# Altium PCB PCB.PcbDoc (part 3 of 3)
Units mm, origin at the board's own origin, x right, y up, seen from the top; angles counter-clockwise.
Board outline 145 x 65 mm, 4 copper layers (Top Layer, GND, VDD, Bottom Layer), stack 1.565 mm thick; 229 components, 167 nets, 739 pads, 265 vias.
Unrouted connection lines stored in the file: 1.
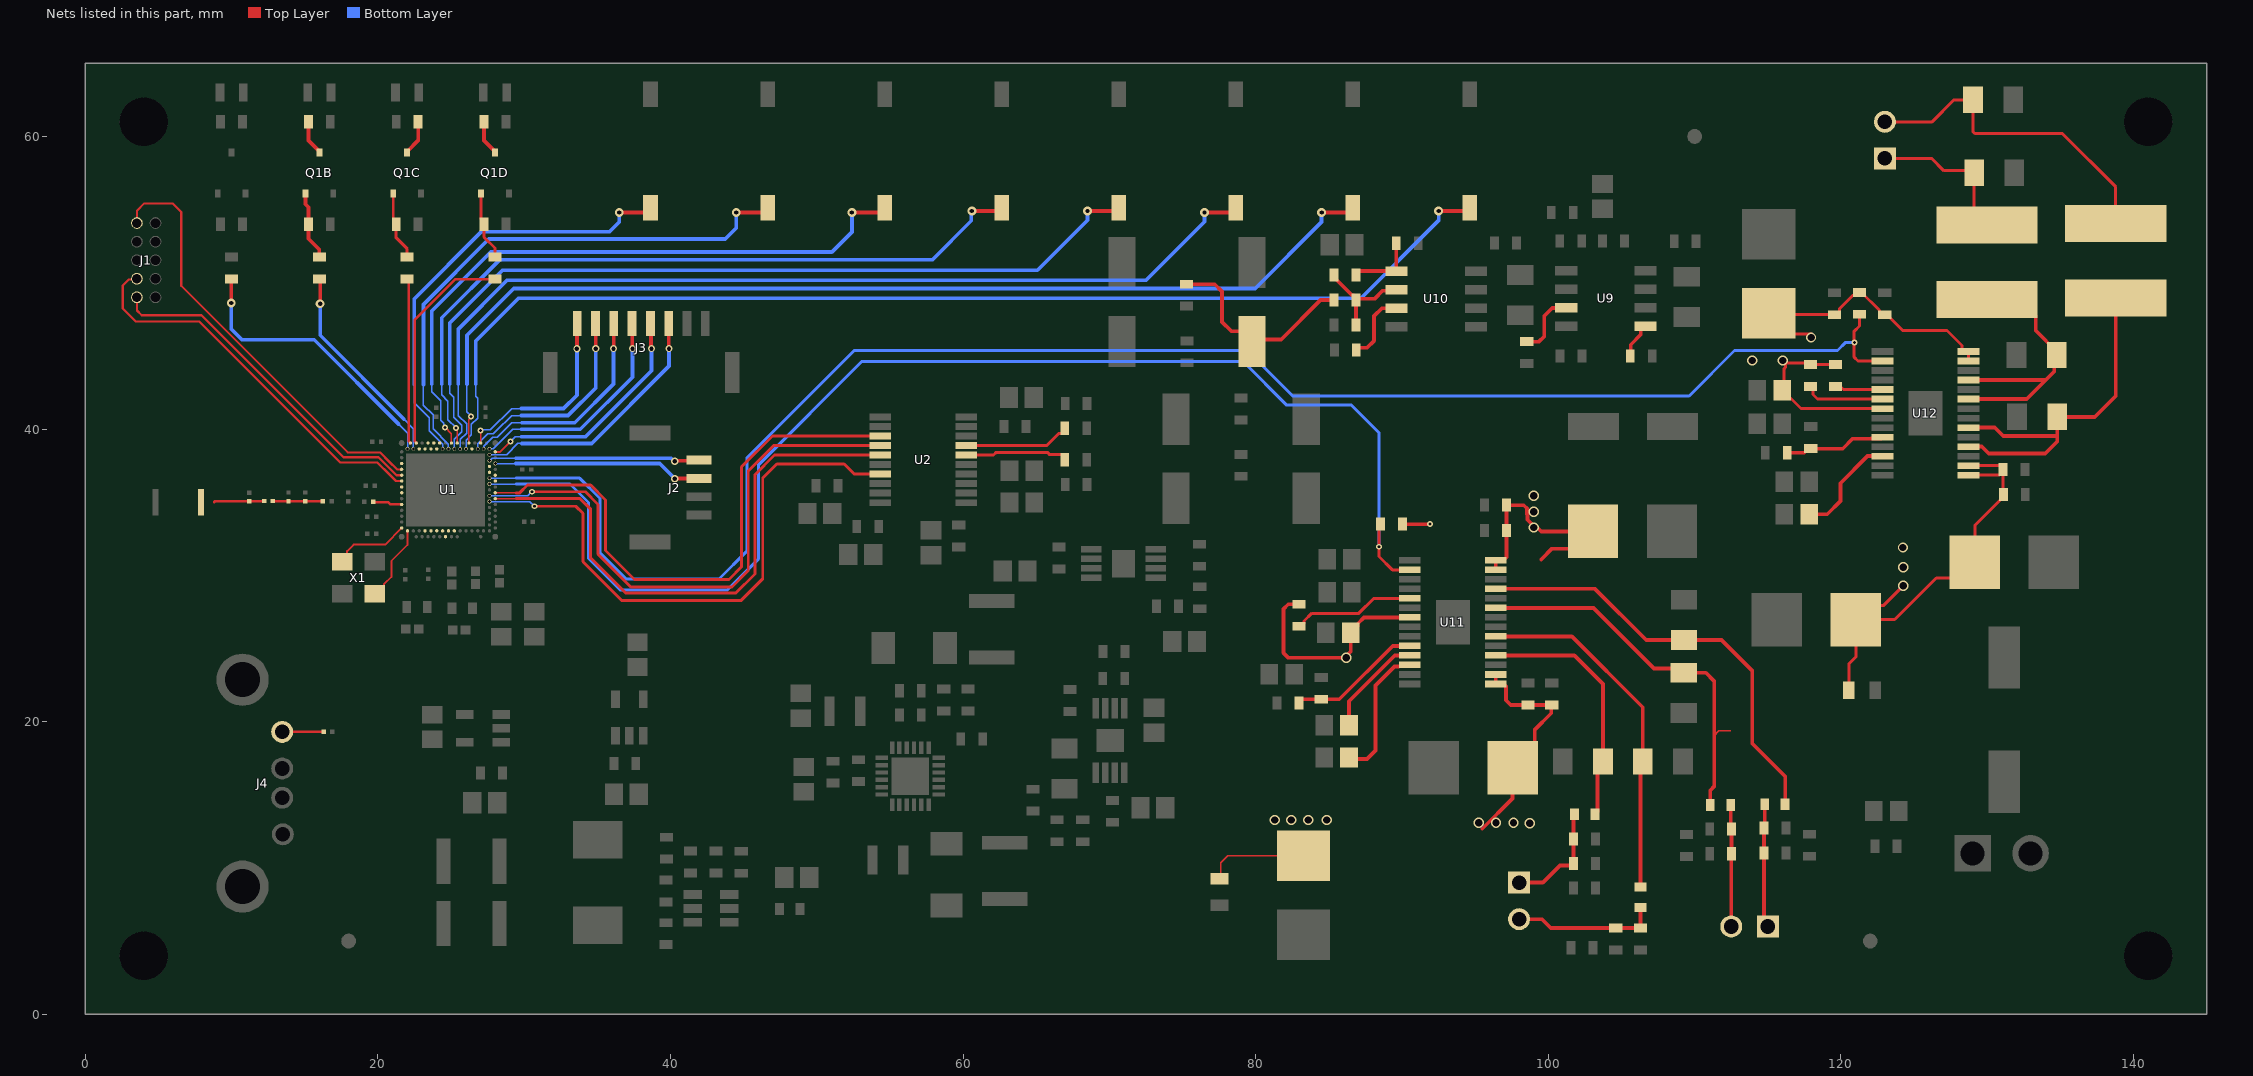
[diagram p5: the nets of this part, all layers, seen from the top]

## Via types
v1: diameter 0.403, hole 0.2, Top Layer to Bottom Layer, 149 vias
v2: diameter 0.703, hole 0.5, Top Layer to Bottom Layer, 32 vias
v3: diameter 0.503, hole 0.3, Top Layer to Bottom Layer, 27 vias
v4: diameter 0.25, hole 0.2, Top Layer to Bottom Layer, 17 vias
v5: diameter 0.6, hole 0.3, Top Layer to Bottom Layer, 17 vias
v6: diameter 0.61, hole 0.305, Top Layer to Bottom Layer, tented both sides, 16 vias
v7: diameter 1.003, hole 0.8, Top Layer to Bottom Layer, 6 vias
v8: diameter 0.6/0.6 (per signal layer), hole 0.3, Top Layer to Bottom Layer, 1 vias

## Nets (pads, with @x,y where several pads share a name; then routed paths per layer and width w, separated by ;. In a path a pad name is that pad's centre, name@x,y a point inside that pad or via, vN(x,y) a via of type N, cw(c..) or ccw(c..) an arc to the next point about the centre after c; other vN are vias at no path point) (continued)
NetQ1B_1: Q1B.1 R3B.2 R4B.1 | length 4.7
  Top Layer w0.254: Q1B.1@15.05,56.1 15.05,55.359 15.25,55.159 R4B.1@15.25,54 15.25,53 16,52.25 R3B.2@16,51.75
NetQ1B_3: Q1B.3 R2B.1 | length 2.4
  Top Layer w0.254: R2B.1@15.25,61 15.25,59.725 16,58.975 Q1B.3@16,58.9
NetQ1C_1: Q1C.1 R3C.2 R4C.1 | length 4.7
  Top Layer w0.203: Q1C.1@21.05,56.1 21.05,54.35 21.25,54.15 R4C.1@21.25,54 21.25,53.07 22,52.32 R3C.2@22,51.75
NetQ1C_3: Q1C.3 R2C.1 | length 2.4
  Top Layer w0.254: Q1C.3@22,58.9 22,58.975 22.75,59.725 R2C.1@22.75,61
NetQ1D_1: Q1D.1 R3D.2 R4D.1 | length 4.7
  Top Layer w0.203: Q1D.1@27.05,56.1 27.05,54.35 27.25,54.15 R4D.1@27.25,54 27.25,53.116 28,52.366 R3D.2@28,51.75
NetQ1D_3: Q1D.3 R2D.1 | length 2.4
  Top Layer w0.254: R2D.1@27.25,61 27.254,60.996 27.254,59.721 28,58.975 Q1D.3@28,58.9
NetR5_1: R5.1 U2.7 | length 7.3
  Top Layer w0.203: U2.7@60.225,38.875 65.723,38.875 66.558,39.711 66.753,39.711 66.951,39.909 R5.1@66.951,40.059
NetR6_1: R6.1 U2.6 | length 7.1
  Top Layer w0.203: U2.6@60.225,38.225 62.076,38.225 62.255,38.405 65.761,38.405 65.917,38.248 66.753,38.248 66.951,38.05 R6.1@66.951,37.9
NetR21_1: R21.1 R32.1 U10.1 | length 4.8
  Top Layer w0.254: R32.1@86.856,50.521 86.856,50.602 87.054,50.8 U10.1@89.625,50.8 89.6,50.825 R21.1@89.6,52.7
NetR26_2: R26.2 U9.3 | length 4.5
  Top Layer w0.254: R26.2@98.525,45.975 99.366,45.975 99.72,46.33 99.72,47.727 100.265,48.271 101.194,48.271 U9.3@101.213,48.29
NetR27_2: R27.2 U9.5 | length 2.4
  Top Layer w0.254: R27.2@105.625,45.075 105.625,45.766 106.321,46.463 106.321,46.822 106.519,47.02 U9.5@106.637,47.02
NetR32_2: R32.2 R33.2 R34.2 U10.2 | length 7.1
  Top Layer w0.254: R32.2@85.356,50.521 85.356,50.371 86.585,49.142 86.683,49.142 86.856,48.969 R34.2@86.856,48.819 ; R33.2@86.856,47.117 R34.2@86.856,48.819 ; U10.2@89.625,49.53 89.554,49.459 88.677,49.459 88.113,48.895 86.932,48.895 R34.2@86.856,48.819
NetR35_2: R35.2 U10.3 | length 4.9
  Top Layer w0.254: R35.2@86.875,45.4 87.025,45.55 87.612,45.55 88.087,46.025 88.087,47.727 88.621,48.26 U10.3@89.625,48.26
NetR40_1: R40.1 R42.2 U11.10 | length 9.2
  Top Layer w0.254: R42.2@82.95,21.275 83.199,21.525 R40.1@84.475,21.525 85.711,21.525 89.361,25.175 U11.10@90.537,25.175
NetR41_2: R41.2 U11.5 | length 8.5
  Top Layer w0.203: R41.2@82.95,26.525 83.1,26.525 83.298,26.723 83.298,26.873 83.832,27.407 87.046,27.407 88.064,28.425 U11.5@90.537,28.425
NetR45_1: R45.1 R47.2 U12.10 | length 7
  Top Layer w0.254: R47.2@116.32,38.379 117.491,38.379 117.782,38.671 R45.1@117.932,38.671 117.944,38.659 120.117,38.659 120.802,39.345 122.078,39.345 122.085,39.352 122.739,39.352 U12.10@122.837,39.45
NetR46_2: R46.2 U12.5 | length 3.1
  Top Layer w0.203: R46.2@119.812,42.913 119.962,42.913 120.174,42.7 U12.5@122.837,42.7
NetR48_2: R48.2 U12.6 | length 5.4
  Top Layer w0.203: R48.2@118.085,42.913 118.085,42.367 118.402,42.05 U12.6@122.837,42.05
NetU1_B30: U1.B30 X1.1 | length 5.3
  Top Layer w0.127: X1.1@19.775,28.742 19.875,28.742 20.411,29.279 20.411,29.379 20.93,29.897 20.93,30.988 22.025,32.083 U1.B30@22.025,33.042
NetU1_C31: U1.C31 X1.3 | length 5.2
  Top Layer w0.127: X1.3@17.575,30.942 17.892,31.259 17.892,31.658 18.339,32.106 20.488,32.106 U1.C31@21.625,33.242
OUTL+: C77.2 C78.2 FB2.2 J6.1 | length 8.5
  Top Layer w0.254: FB2.2@114.783,14.347 114.783,12.772 C77.2@114.733,12.722 C78.2@114.733,11.022 114.733,6.267 J6.1@115,6
OUTL-: C85.2 C86.2 FB4.2 J6.2 | length 8.3
  Top Layer w0.254: FB4.2@112.46,14.3 112.46,12.735 C85.2@112.523,12.672 C86.2@112.523,10.972 112.5,10.948 J6.2@112.5,6
OUTNL: C84.2 FB4.1 U11.23 | length 26.9
  Top Layer w0.102: 111.328,19.05 111.658,19.38 112.471,19.38
  Top Layer w0.254: U11.23@96.413,27.775 103.086,27.775 107.224,23.637 108.955,23.637 C84.2@109.245,23.346 110.766,23.346 111.328,22.784 111.328,19.05 111.328,15.57 111.06,15.302 FB4.1@111.06,14.3
OUTNR: C88.2 FB5.1 U11.20 | length 24.3
  Top Layer w0.254: U11.20@96.413,25.825 101.607,25.825 106.448,20.984 C88.2@106.448,17.272 ; FB5.1@106.3,8.7 C88.2@106.3,17.272
OUTPL: C83.2 FB2.1 U11.25 | length 29.9
  Top Layer w0.254: U11.25@96.413,29.075 103.183,29.075 106.683,25.574 C83.2@109.271,25.574 111.84,25.574 113.944,23.47 113.944,18.482 116.183,16.244 FB2.1@116.183,14.347
OUTPR: C90.2 FB6.1 U11.18 | length 17.3
  Top Layer w0.254: U11.18@96.413,24.525 101.778,24.525 103.737,22.566 C90.2@103.737,17.272 103.362,16.897 103.362,13.838 FB6.1@103.189,13.665
OUTR+: C96.2 C97.2 FB6.2 J7.1 | length 7.6
  Top Layer w0.254: J7.1@98,9 99.625,9 100.788,10.162 101.564,10.162 101.725,10.324 C96.2@101.725,11.975 101.725,13.601 FB6.2@101.789,13.665
OUTR-: C92.2 C93.2 FB5.2 J7.2 | length 9.9
  Top Layer w0.254: J7.2@98,6.5 99.57,6.5 100.17,5.9 C93.2@104.6,5.9 C92.2@106.3,5.9 FB5.2@106.3,7.3
"P0.00 / XL1": U1.N1 U2.15 | length 38.8
  Top Layer w0.102: U1.N1@28.025,35.242 29.429,35.242
  Top Layer w0.203: 29.429,35.242 33.82,35.242 34.544,34.519 34.544,31.191 36.957,28.778 44.45,28.778 45.771,30.099 45.771,36.881 47.115,38.225 U2.15@54.349,38.225
"P0.01 / XL2": U1.R1 U2.13 | length 39.3
  Top Layer w0.102: U1.R1@28.025,35.642 28.031,35.636 29.439,35.636
  Top Layer w0.203: 29.445,35.642 29.699,35.642 30.226,36.17 34.544,36.17 35.56,35.154 35.56,31.699 37.541,29.718 43.993,29.718 44.856,30.582 44.856,37.414 46.967,39.525 U2.13@54.349,39.525
"P0.02 / NFC1": U1.W1
"P0.03 / NFC2": U1.AA1
"P0.04 / AIN0": R39.2 U1.V2 U11.2 | length 90.8
  Top Layer w0.203: R39.2@88.525,33.5 88.417,33.392 v1(88.417,31.953) 88.417,31.293 89.335,30.375 U11.2@90.537,30.375
  Bottom Layer w0.102: v4(27.625,36.242) 29.429,36.242
  Bottom Layer w0.203: 29.429,36.242 33.125,36.242 34.392,34.976 34.392,31.166 36.551,29.007 43.891,29.007 46.025,31.14 46.025,37.567 53.086,44.628 79.121,44.628 82.118,41.631 86.538,41.631 88.417,39.751 v1(88.417,31.953)
"P0.05 / AIN1": R44.2 U1.Y2 U12.2 | length 116.5
  Top Layer w0.203: R44.2@121.26,47.84 121.26,47.041 120.902,46.684 120.902,45.95 v1(120.929,45.923) 120.904,45.898 120.904,44.907 121.161,44.65 U12.2@122.837,44.65
  Bottom Layer w0.102: v4(27.625,36.642) 29.429,36.642
  Bottom Layer w0.203: 29.429,36.642 33.792,36.642 35.179,35.255 35.179,31.547 36.982,29.743 43.307,29.743 45.212,31.648 45.212,38.024 52.553,45.364 79.426,45.364 82.525,42.266 109.626,42.266 112.725,45.364 119.761,45.364 120.32,45.923 v1(120.929,45.923)
"P0.06 / AIN2": U1.AB2
"P0.07 / AIN3": U1.AD2
"P0.08 / TRACEDATA3": J3.3 U1.AH2 | length 17.7
  Top Layer w0.254: J3.3@39.875,47.225 39.888,47.212 39.888,45.512 v3(39.9,45.5)
  Bottom Layer w0.102: v4(27.625,38.242) 28.793,38.242 29.566,39.014 29.845,39.014
  Bottom Layer w0.254: 29.845,39.014 34.614,39.014 39.9,44.3 v3(39.9,45.5)
"P0.09 / TRACEDATA2": J3.4 U1.AJ1 | length 16.2
  Top Layer w0.127: U1.AJ1@28.025,38.442 28.358,38.442 v1(29.058,39.141)
  Top Layer w0.254: J3.4@38.625,47.225 38.663,47.187 38.663,45.537 v3(38.7,45.5)
  Bottom Layer w0.102: v1(29.058,39.141) 29.388,39.472 29.82,39.472
  Bottom Layer w0.254: 29.82,39.472 34.188,39.472 38.7,43.983 v3(38.7,45.5)
"P0.10 / TRACEDATA1": J3.5 U1.AK2 | length 15.5
  Top Layer w0.254: J3.5@37.375,47.225 37.387,47.212 37.387,45.512 v3(37.4,45.5)
  Bottom Layer w0.102: v4(27.625,38.642) 27.873,38.642 29.102,39.871 29.21,39.98 29.82,39.98
  Bottom Layer w0.254: 29.82,39.98 33.833,39.98 37.4,43.547 v3(37.4,45.5)
"P0.11 / TRACEDATA0": J3.6 U1.AK4 | length 15
  Top Layer w0.254: v3(36.1,45.5) 36.113,45.513 36.113,47.212 J3.6@36.125,47.225
  Bottom Layer w0.102: v4(27.225,38.642) 27.225,38.832 27.838,39.446 28.169,39.446 28.594,39.871 29.159,40.437 29.845,40.437
  Bottom Layer w0.254: 29.845,40.437 33.452,40.437 36.1,43.085 v3(36.1,45.5)
"P0.12 / TRACECLK": J3.7 U1.AK6 | length 14.4
  Top Layer w0.254: J3.7@34.875,47.225 34.887,47.212 34.887,45.512 v3(34.9,45.5)
  Bottom Layer w0.102: v4(26.825,38.642) 26.825,38.991 27.508,39.675 27.889,39.675 28.086,39.871 29.134,40.919 29.82,40.919
  Bottom Layer w0.254: 29.82,40.919 32.995,40.919 34.9,42.825 v3(34.9,45.5)
"P0.13 / QSPI0": J3.8 U1.AL5 | length 13.4
  Top Layer w0.102: U1.AL5@27.025,39.042 v1(27.026,39.903)
  Top Layer w0.254: v3(33.604,45.491) 33.615,45.502 33.615,47.215 J3.8@33.625,47.225
  Bottom Layer w0.102: v1(27.026,39.903) 27.06,39.938 27.67,39.938 29.134,41.402 29.82,41.402
  Bottom Layer w0.254: 29.82,41.402 32.69,41.402 33.604,42.316 v3(33.604,45.491)
"P0.14 / QSPI1": U1.AK8
"P0.15 / QSPI2": SW8.1 U1.AK10 | length 79.9
  Top Layer w0.254: v5(92.5,54.9) 94.411,54.9 SW8.1@94.636,55.125
  Bottom Layer w0.102: v4(26.025,38.642) 26.025,39.233 26.391,39.599 26.391,40.31 26.822,40.742 26.822,42.113 26.695,42.24 26.695,43.053
  Bottom Layer w0.254: 26.695,43.053 26.695,46.025 29.616,48.946 87.198,48.946 92.5,54.248 v5(92.5,54.9)
"P0.16 / QSPI3": SW7.1 U1.AL9 | length 72.1
  Top Layer w0.102: U1.AL9@26.225,39.042 26.225,40.646 26.365,40.787 v1(26.365,40.869)
  Top Layer w0.254: v5(84.5,54.8) 86.311,54.8 SW7.1@86.636,55.125
  Bottom Layer w0.102: 26.086,43.028 26.086,41.181 26.365,40.901 v1(26.365,40.869)
  Bottom Layer w0.254: 26.086,43.053 26.086,46.406 29.286,49.606 79.959,49.606 84.5,54.147 v5(84.5,54.8)
"P0.17 / QSPI_CLK": SW6.1 U1.AK12 | length 65.5
  Top Layer w0.254: v5(76.5,54.8) 78.311,54.8 SW6.1@78.636,55.125
  Bottom Layer w0.102: 25.502,43.053 25.502,40.919 26.06,40.361 26.06,39.726 25.625,39.29 v4(25.625,38.642)
  Bottom Layer w0.254: 25.502,43.053 25.502,46.838 28.829,50.165 72.492,50.165 76.5,54.173 v5(76.5,54.8)
"P0.18 / QSPI_CS": SW5.1 U1.AK14 | length 58.5
  Top Layer w0.254: v5(68.5,54.9) 70.411,54.9 SW5.1@70.636,55.125
  Bottom Layer w0.102: 24.917,43.053 24.917,42.443 25.197,42.164 25.197,40.792 25.73,40.259 25.73,39.802 25.225,39.296 v4(25.225,38.642)
  Bottom Layer w0.254: 24.917,43.053 24.917,47.244 28.524,50.851 65.075,50.851 68.5,54.276 v5(68.5,54.9)
P0.19: SW4.1 U1.AL13 | length 50.7
  Top Layer w0.102: v1(25.349,40.081) 25.349,40 25.425,39.924 U1.AL13@25.425,39.042
  Top Layer w0.254: v5(60.6,54.9) 62.411,54.9 SW4.1@62.636,55.125
  Bottom Layer w0.102: 24.359,43.04 24.359,42.342 24.79,41.91 24.79,40.64 v1(25.349,40.081)
  Bottom Layer w0.254: 24.359,43.053 24.359,47.6 28.321,51.562 57.887,51.562 60.554,54.229 60.554,54.854 v5(60.6,54.9)
P0.20: SW2.1 U1.AK16 | length 37.5
  Top Layer w0.254: v5(44.5,54.8) 46.311,54.8 SW2.1@46.636,55.125
  Bottom Layer w0.102: 23.114,43.028 23.114,41.631 23.774,40.97 23.774,40.005 24.825,38.955 v4(24.825,38.642)
  Bottom Layer w0.254: 23.114,43.028 23.114,48.514 27.584,52.984 43.739,52.984 44.5,53.746 v5(44.5,54.8)
P0.21: SW3.1 U1.AL15 | length 44.3
  Top Layer w0.102: v1(24.587,40.107) 25.025,39.669 U1.AL15@25.025,39.042
  Top Layer w0.254: v5(52.4,54.8) 54.311,54.8 SW3.1@54.636,55.125
  Bottom Layer w0.102: 23.673,43.1 23.673,42.545 24.282,41.935 24.282,40.589 24.489,40.382 24.489,40.286 24.587,40.188 v1(24.587,40.107)
  Bottom Layer w0.254: 23.673,43.053 23.673,48.057 27.711,52.095 51.029,52.095 52.4,53.467 v5(52.4,54.8)
P0.22: SW1.1 U1.AK18 | length 30.2
  Top Layer w0.254: v5(36.5,54.8) 38.311,54.8 SW1.1@38.636,55.125
  Bottom Layer w0.102: 22.479,43.028 22.479,41.808 23.502,40.786 23.502,39.871 24.425,38.948 v4(24.425,38.642)
  Bottom Layer w0.254: 22.479,43.028 22.479,48.895 27.077,53.493 35.84,53.493 36.5,54.153 v5(36.5,54.8)
P0.23: U1.AK20
P0.24: R3D.1 U1.AL27 | length 15.1
  Top Layer w0.178: U1.AL27@22.625,39.042 22.625,39.055 22.514,39.166 22.514,39.871 22.514,47.447 25.317,50.25 R3D.1@28,50.25
"P0.25 / AIN4": R3B.1 U1.AK28 | length 14.3
  Top Layer w0.254: R3B.1@16,50.25 16.053,50.197 v5(16.053,48.565)
  Bottom Layer w0.102: 21.768,40.691 22.425,40.034 v4(22.425,38.642)
  Bottom Layer w0.254: v5(16.053,48.565) 16.053,46.406 21.768,40.691
"P0.26 / AIN5": R3C.1 U1.AL29 | length 11.3
  Top Layer w0.127: R3C.1@22,50.25 R3C.1@22.098,50.152
  Top Layer w0.178: R3C.1@22.098,50.152 22.098,39.871 22.098,39.182 22.225,39.055 U1.AL29@22.225,39.042
"P0.27 / AIN6": R3A.1 U1.AK30 | length 19.5
  Top Layer w0.254: v8(9.982,48.616) 9.982,50.232 R3A.1@10,50.25
  Bottom Layer w0.102: 21.412,40.335 22.025,39.723 v4(22.025,38.642)
  Bottom Layer w0.254: v8(9.982,48.616) 9.982,46.838 10.719,46.101 15.646,46.101 21.412,40.335
"P0.28 / AIN7": U1.AE31
P0.29: U1.U31
P0.30: U1.B24
P0.31: U1.B22
P1.00: U1.M2 U2.17 | length 39.7
  Top Layer w0.203: v1(30.709,34.722) 31.471,34.722 33.528,34.722 34.011,34.239 34.011,30.937 36.678,28.27 44.806,28.27 46.304,29.769 46.304,36.652 47.269,37.617 51.867,37.617 52.559,36.925 U2.17@54.349,36.925
  Bottom Layer w0.102: v4(27.625,35.042) 30.388,35.042 v1(30.709,34.722)
P1.01: U1.P2 U2.14 | length 39.5
  Top Layer w0.203: v1(30.531,35.712) 31.369,35.712 34.188,35.712 35.052,34.849 35.052,31.445 37.287,29.21 44.196,29.21 45.314,30.328 45.314,37.135 47.054,38.875 U2.14@54.349,38.875
  Bottom Layer w0.102: v4(27.625,35.442) 30.229,35.442 30.499,35.712 v1(30.531,35.712)
"P1.02 / I2C": J2.3 U1.AE1 | length 14.4
  Top Layer w0.254: v3(40.3,36.6) 40.313,36.612 41.938,36.612 J2.3@41.95,36.625
  Bottom Layer w0.102: v4(28.025,37.642) 29.429,37.642
  Bottom Layer w0.254: 29.429,37.642 39.258,37.642 v3(40.3,36.6)
"P1.03 / I2C": J2.4 U1.AF2 | length 14.5
  Top Layer w0.254: v3(40.3,37.8) 40.337,37.837 41.912,37.837 J2.4@41.95,37.875
  Bottom Layer w0.102: v4(27.625,37.842) 27.642,37.842 27.8,38 29.429,38
  Bottom Layer w0.254: 29.429,38 40.033,38 40.233,37.8 v3(40.3,37.8)
P1.04: U1.AL19
P1.05: U1.AK22
P1.06: U1.AL21
P1.07: U1.AK24
P1.08: U1.AL23
P1.09: U1.AK26
P1.10: U1.R31
P1.11: U1.B20
P1.12: U1.B18
P1.13: U1.A17
P1.14: U1.B16
P1.15: U1.B14
PVCC_M: C99.1 C100.2 C101.2 C102.1 C104.1 C105.2 C106.2 C108.2 FB7.2 R44.1 R46.1 R48.1 U12.7 U12.15 U12.16 U12.27 U12.28 | length 64.5
  Top Layer w0.203: C104.1@115.05,47.9 C104.1@115.135,47.815 ; C108.2@115.988,42.647 116.115,42.774 116.115,44.128 116.205,44.218 v2@116.205,44.501 ; v2(116.027,44.679) v2@116.205,44.501 ; C108.2@116.18,42.596 116.18,42.496 117.275,41.4 U12.7@122.837,41.4 ; R48.1@117.907,44.413 117.819,44.501 v2@116.205,44.501 ; v2@118.008,46.482 116.468,46.482 C104.1@115.135,47.815 ; R48.1@118.085,44.413 R46.1@119.812,44.413 ; FB7.2@120.537,22.149 120.537,23.941 121.013,24.417 C102.1@121.013,26.975 ; v2(124.257,29.286) 122.924,27.953 121.992,27.953 C102.1@121.013,26.975 ; U12.15@128.713,36.85 130.85,36.85 131.075,37.075 C101.2@131.075,37.225 131.075,37.302 130.877,37.5 U12.16@128.713,37.5 ; U12.27@128.713,44.65 U12.28@128.713,45.3 128.403,45.3 128.279,45.423 128.279,45.711 127.254,46.736 124.216,46.736 123.137,47.815 122.837,47.815 122.638,48.013 122.638,48.111 121.41,49.34 R44.1@121.26,49.34 121.061,49.142 120.821,49.142 119.906,48.227 119.906,48.013 119.708,47.815 C104.1@115.135,47.815 ; C101.2@131.088,37.212 131.088,35.537 C100.2@131.1,35.525 131.1,35.375 129.151,33.426 C99.1@129.151,30.886 128.085,29.82 126.517,29.82 123.673,26.975 C102.1@121.013,26.975
  other v2: 124.257,30.556 124.231,31.902 113.944,44.679 117.958,46.253
PVCC_S: C74.1 C75.2 C76.2 C79.1 C80.1 C81.2 C82.2 C87.2 FB3.2 R39.1 R41.1 U11.7 U11.15 U11.16 U11.27 U11.28 | length 56.4
  Top Layer w0.102: FB3.2@77.521,9.257 77.622,9.358 77.622,10.363 78.087,10.828 C79.1@83.261,10.828
  Top Layer w0.254: R41.1@82.95,28.025 82.225,28.025 81.9,27.7 81.9,24.7 82.241,24.359 v2(86.182,24.359) 86.182,24.48 86.499,24.797 C87.2@86.499,26.06 86.972,26.533 86.972,26.692 87.405,27.125 U11.7@90.537,27.125 ; R39.1@90.025,33.5 v1(91.9,33.5) ; 95.479,12.675 97.55,14.746 C74.1@97.55,16.85 99.06,18.36 99.06,19.431 100.203,20.574 100.203,21.119 C75.2@100.228,21.145 C76.2@98.603,21.145 97.422,21.145 97.1,21.468 97.1,22.401 96.925,22.575 U11.15@96.413,22.575 U11.16@96.413,23.225 ; U11.27@96.413,30.375 U11.28@96.413,31.025 96.925,31.025 97.143,31.243 C81.2@97.143,34.798 98.323,34.798 98.539,34.583 98.539,34.195 98.576,34.158 98.576,33.803 98.984,33.396 v2@98.984,33.274 ; v2@99.131,33.376 99.506,33 C80.1@103.05,33 103.05,32.9 101.976,31.826 100.254,31.826 99.517,31.09
  other v2: 98.73,13.056 95.25,13.081 96.418,13.081 97.612,13.081 81.305,13.284 82.423,13.284 83.591,13.284 84.861,13.284 99,33.274 99,34.341 99,35.433
RESET: J1.10 U1.AC31 | length 29.6
  Top Layer w0.152: J1.10@3.53,54.08 3.53,54.915 4.037,55.423 5.969,55.423 6.553,54.839 6.553,49.784 17.932,38.405 20.142,38.405 20.796,37.751 21.305,37.242 U1.AC31@21.625,37.242
RF: C15.1 L4.2 L5.1 L6.2 | length 3.4
  Top Layer w0.17: L5.1@12.822,35.077 12.83,35.07 13.886,35.07 L6.2@13.894,35.062 C15.1@15.037,35.062 15.042,35.057 16.231,35.057 L4.2@16.235,35.052
RF_A: ANT1.1 L5.2 L7.2 | length 3.5
  Top Layer w0.17: 8.8,35 8.857,35.057 L7.2@11.201,35.057 11.212,35.067 12.212,35.067 L5.2@12.222,35.077
RF_B: L3.1 U1.L31 | length 2
  Top Layer w0.17: L3.1@19.68,35.027 19.706,35.001 20.701,35.001 20.86,34.842 U1.L31@21.625,34.842
RIGHT_AF: C72.2 R30.2 R34.1 | length 14.3
  Top Layer w0.254: R30.2@75.275,49.9 77.202,49.9 77.699,49.403 77.699,47.32 78.334,46.685 79.341,46.685 79.75,46.276 C72.2@79.75,45.975 79.901,46.126 81.737,46.126 84.43,48.819 R34.1@85.356,48.819
RINN: C94.2 U11.11 | length 7.1
  Top Layer w0.254: C94.2@86.375,19.75 86.375,21.402 89.498,24.525 U11.11@90.537,24.525
RINP: C95.2 U11.12 | length 9.5
  Top Layer w0.254: C95.2@86.375,17.55 86.476,17.449 87.604,17.449 88.19,18.035 88.19,22.48 89.484,23.774 89.778,23.774 89.78,23.777 89.926,23.777 90.024,23.875 U11.12@90.537,23.875
SUB_IN: C112.2 U12.12 | length 7.3
  Top Layer w0.254: C112.2@117.85,34.175 119.062,34.175 119.964,35.077 119.964,36.297 121.818,38.15 U12.12@122.837,38.15
SWDCLK: J1.4 U1.W31 | length 26.7
  Top Layer w0.152: J1.4@3.53,50.27 3.476,50.216 2.972,50.216 2.565,49.809 2.565,48.235 3.454,47.346 7.798,47.346 17.424,37.719 19.964,37.719 20.796,36.888 21.241,36.442 U1.W31@21.625,36.442
SWDIO: J1.2 U1.AA31 | length 23.7
  Top Layer w0.152: J1.2@3.53,49 3.53,48.108 3.861,47.777 7.95,47.777 17.653,38.075 20.041,38.075 20.796,37.32 21.273,36.842 U1.AA31@21.625,36.842
VBUS: J4.1 R1.2 | length 2.8
  Top Layer w0.178: J4.1@13.46,19.3 13.462,19.302 16.289,19.302 R1.2@16.291,19.304
Woofer+: C103.2 J8.1 L8.2 | length 10.4
  Top Layer w0.203: J8.1@123,58.5 126.183,58.5 127.025,57.658 128.967,57.658 C103.2@129.1,57.525 129.1,54.82 L8.2@129.975,53.945
Woofer-: C110.2 J8.2 L9.2 | length 22.6
  Top Layer w0.203: J8.2@123,61 126.232,61 127.732,62.5 C110.2@129.025,62.5 129.025,60.317 129.144,60.198 135.128,60.198 138.775,56.551 L9.2@138.775,54.045
WOOFER_BF_+: C107.2 L8.1 U12.23 U12.25 | length 20.2
  Top Layer w0.254: U12.23@128.713,42.05 132.703,42.05 134.003,43.35 ; U12.25@128.713,43.35 134.003,43.35 ; L8.1@129.975,48.855 132.18,48.855 133.308,47.727 133.308,46.727 134.75,45.285 C107.2@134.75,45.06 134.58,44.889 134.58,43.927 134.003,43.35
WOOFER_BF_-: C109.2 L9.1 U12.18 U12.20 | length 25.9
  Top Layer w0.254: U12.18@128.713,38.8 129.627,38.8 130.099,38.329 133.96,38.329 134.776,39.145 134.776,39.526 ; U12.20@128.713,40.1 130.512,40.1 131.086,39.526 134.776,39.526 ; C109.2@134.725,40.825 137.345,40.825 138.775,42.255 L9.1@138.775,48.955 ; C109.2@134.776,40.843 134.776,39.526
pads on no net: J1.6 J1.7 J1.8 U1. U1.A1 U1.A31 U1.AG31 U1.AL1 U1.AL31 U1.D2 U1.F2 U1.J1 U1.K2 U1.T2 U2.12 U3.7 U3.12 U3.20 U4.7 U5.7 U6.5 U7.4 U8.4 U10.5 U10.6 U10.7 U11.1 U11.13 U12.1 U12.13

## Polygon pours and split planes (outlines as drawn)
GND on Top Layer "GND_L01_P043" (solid, remove dead copper, pour order 43): -0.001,0 -0.001,65 144.999,65 144.999,0
3.3V_PCM on Top Layer "Top Layer-3.3V_PCM" (solid, pour order 41): 35.509,20.726 35.636,20.599 36.83,20.599 37.008,20.777 37.008,22.225 37.313,22.53 38.786,22.53 39.116,22.2 40.742,22.2 40.996,22.454 40.996,24.46 40.742,24.714 39.141,24.714 38.913,24.486 35.865,24.486 35.509,24.13
+5V_RC4580 on Top Layer "NONET_L-01_P-001" (solid, pour order 39): 72.365,30.15 72.238,30.023 72.238,26.924 72.644,26.518 75.108,26.518 75.26,26.365 75.26,24.587 75.463,24.384 77.521,24.384 77.902,24.765 77.902,27.965 77.495,28.372 75.489,28.372 75.362,28.245 75.362,27.356 75.209,27.203 74.117,27.203 73.889,27.432 73.889,29.134 74.193,29.439 74.193,29.997 74.041,30.15 72.39,30.15
-5V_RC4580 on Top Layer "NONET_L-01_P-001" (solid, pour order 38): 70.383,25.425 70.383,22.327 70.764,21.946 70.764,20.142 73.965,20.142 74.168,20.345 74.168,22.25 73.508,22.911 72.314,22.911 71.755,23.47 71.755,25.4 71.501,25.654 70.612,25.654
NetC50_1 on Top Layer "NONET_L-01_P-001" (solid, pour order 37): 43.256,7.62 43.256,6.782 45.009,6.782 45.009,4.801 44.729,4.521 42.266,4.521 41.377,5.41 37.795,5.41 37.262,5.944 37.262,7.899 36.703,8.458 32.817,8.458 32.32,7.961 32.32,4.028 32.791,3.556 45.695,3.556 45.974,3.835 45.974,7.112 45.466,7.62
NetC53_2 on Top Layer "NONET_L-01_P-001" (solid, pour order 36): 43.002,8.661 43.129,8.788 43.84,8.788 43.967,8.915 43.967,10.109 44.171,10.312 45.491,10.312 45.644,10.16 46.634,10.16 46.888,10.414 48.235,10.414 48.463,10.185 48.463,8.484 48.108,8.128 48.108,6.553 47.904,6.35 46.761,6.35 46.558,6.553 46.558,7.264 45.974,7.849 43.002,7.849
12V on Top Layer "NONET_L-01_P-001" (solid, pour order 35): 48.387,6.452 48.717,6.121 49.682,6.121 50.241,5.563 51.105,5.563 51.435,5.893 51.435,7.366 50.978,7.823 48.387,7.823
3.3V_nRF on Top Layer "NONET_L-01_P-001" (solid, pour order 34): 26.721,19.279 26.924,19.075 26.924,18.059 26.772,17.907 25.019,17.907 24.714,17.602 24.714,16.612 24.105,16.002 22.581,16.002 21.971,16.612 21.971,18.821 22.631,19.482 24.816,19.482 25.019,19.279
5v_TPS54202 on Top Layer "Top Layer-5v_TPS54202" (solid, pour order 30): 26.594,4.293 27.127,3.759 29.362,3.759 29.947,4.343 29.947,7.01 32.537,9.601 37.313,9.601 37.795,10.084 37.795,10.947 38.303,11.455 40.462,11.455 42.901,13.894 45.39,13.894 46.228,13.056 52.222,13.056 53.975,14.808 54.889,14.808 54.889,15.723 53.619,15.723 51.791,13.894 48.26,13.894 47.981,14.173 47.981,16.205 50.013,16.205 50.419,16.612 51.765,16.612 51.943,16.789 51.943,21.666 51.537,22.073 50.317,22.073 50.089,21.844 50.089,21.082 49.962,20.955 47.981,20.955 47.447,20.422 47.447,18.351 46.99,17.894 45.504,17.894 43.155,15.545 41.91,15.545 39.573,13.208 37.414,13.208 36.805,13.818 36.805,16.256 36.576,16.485 36.576,19.685 36.551,19.71 36.805,19.964 37.541,19.964 37.77,19.736 37.77,18.298 38.913,18.329 38.913,19.939 38.481,20.371 35.865,20.371 35.357,19.863 35.357,17.831 34.9,17.374 30.124,17.374 30.099,17.348 29.667,17.78 29.667,18.644 29.337,18.974 27.635,18.974 27.534,19.075 27.534,19.888 27.762,20.117 29.515,20.117 29.515,21.006 29.286,21.234 27.661,21.234 27.305,20.879 27.305,18.009 27.762,17.551 27.762,15.596 27.508,15.342 27.508,13.106 26.619,12.217 26.619,4.318
+6V on Top Layer "Top Layer-+6V" (solid, pour order 22): 64.821,23.266 68.986,27.432 68.986,28.55 69.774,29.337 69.774,30.048 67.589,30.048 67.589,29.108 67.437,28.956 65.608,28.956 65.405,29.159 65.405,32.36 65.532,32.487 67.437,32.487 67.589,32.334 67.589,31.801 67.869,31.521 69.774,31.521 69.774,32.715 68.529,32.715 67.894,33.35 65.024,33.35 64.084,32.41 64.084,31.648 63.779,31.344 63.779,29.235 63.983,29.032 63.983,26.873 57.633,26.873 56.642,25.883 56.642,24.638 54.813,22.809 54.813,19.609 55.347,19.075 55.397,19.075 55.397,17.755 55.88,17.755 55.88,19.406 56.388,19.914 56.388,22.53 57.125,23.266
-6V on Top Layer "NONET_L-01_P-001" (solid, pour order 19): 70.764,17.221 70.764,15.265 71.171,14.859 71.171,11.811 70.968,11.608 69.545,11.608 69.342,11.811 69.342,17.17 68.377,17.17 68.377,15.519 68.936,14.961 68.936,12.598 68.783,12.446 65.71,12.446 65.583,12.573 63.729,12.573 63.221,13.081 63.221,15.011 62.001,16.231 57.81,16.231 57.81,15.799 59.741,15.799 60.198,15.342 60.198,13.665 59.665,13.132 59.665,12.827 57.556,12.827 57.125,12.395 57.125,10.363 57.658,9.83 65.126,9.83 66.167,10.871 68.682,10.871 69.139,10.414 72.034,10.414 72.796,11.176 72.796,15.088 71.831,16.053 71.831,16.967 71.577,17.221
12V on Top Layer "Top Layer-12V" (solid, pour order 18): 123.342,10.414 124.739,9.017 130.251,9.017 130.277,8.992 130.658,9.373 130.658,12.573 131.369,13.284 132.588,13.284 133.02,13.716 133.02,18.085 131.724,19.38 124.866,19.38 124.866,20.472 123.571,21.768 123.52,24.344 121.92,22.743 121.92,20.98 121.615,20.676 121.615,16.662 123.342,14.935
PVCC_S on Top Layer "NONET_L-01_P-001" (solid, pour order 16): 76.759,8.484 78.334,8.484 78.74,8.89 80.823,8.89 81.28,8.433 85.395,8.433 86.131,9.169 86.131,13.081 85.166,14.046 81.077,14.046 80.01,12.979 80.01,12.141 79.248,11.379 77.038,11.379 76.505,10.846 76.505,8.738
12V on Top Layer "NONET_L-01_P-001" (solid, pour order 15): 78.384,8.179 79.019,7.544 79.019,5.918 78.384,5.283 74.676,5.283 74.066,5.893 74.066,7.442 74.803,8.179
PVCC_S on Top Layer "NONET_L-01_P-001" (solid, pour order 13): 95.453,30.137 95.453,31.267 95.885,31.699 96.215,31.699 96.469,31.953 96.469,35.662 96.952,36.144 99.289,36.144 100.127,35.306 104.877,35.306 105.435,34.747 105.435,31.013 104.927,30.505 98.4,30.505 98.057,30.163
PVCC_S on Top Layer "NONET_L-01_P-001" (solid, pour order 14): 95.25,23.495 95.25,21.844 95.25,14.478 94.361,13.589 94.361,12.319 95.047,11.633 98.958,11.633 99.695,12.37 99.695,19.228 101.041,20.574 101.041,21.666 100.838,21.869 97.714,21.869 97.485,22.098 97.485,23.495
PVCC_M on Top Layer "Top Layer-PVCC_M" (solid, pour order 12): 116.992,43.688 117.043,43.739 120.091,43.739 120.32,43.967 120.32,44.882 118.948,46.253 118.923,46.253 118.923,47.015 119.05,47.142 120.244,47.142 120.244,48.26 120.599,48.616 121.742,48.616 122.301,48.057 122.301,47.168 123.317,46.152 126.594,46.152 126.949,45.796 126.949,45.06 127.584,44.425 130.048,44.425 130.048,45.974 129.083,46.939 125.222,46.939 123.698,48.463 122.682,48.463 121.869,49.276 121.869,49.835 120.599,49.835 120.599,49.098 119.964,48.463 118.923,48.463 117.069,50.317 113.143,50.317 112.344,49.593 112.344,44.78 112.979,44.145 114.833,44.145 115.341,43.637 115.341,41.554 116.815,41.554 116.992,41.732
PVCC_M on Top Layer "NONET_L-01_P-001" (solid, pour order 9): 121.26,22.657 121.26,20.98 119.736,20.98 118.796,21.92 118.796,29.312 123.19,33.706 125.095,33.706 127.787,36.398 127.787,37.744 131.547,37.744 131.547,28.854 131.013,28.321 126.924,28.321
3.3V_PCM on Top Layer "NONET_L-01_P-001" (solid, pour order 7): 59.487,39.751 59.487,39.319 63.449,39.319 63.449,41.046 63.754,41.351 63.754,43.917 63.398,44.272 62.789,44.272 62.103,43.586 62.103,40.538 61.316,39.751
3.3V_PCM on Top Layer "NONET_L-01_P-001" (solid, pour order 6): 55.093,35.204 55.169,35.128 59.411,35.128 59.487,35.204 60.96,35.204 60.96,34.722 60.604,34.366 60.604,33.299 60.3,32.995 59.08,32.995 58.496,32.41 56.693,32.41 56.693,32.385 55.931,31.623 55.931,30.988 55.626,30.683 53.188,30.683 53.188,32.283 53.518,32.614 53.518,35.077 53.645,35.204
3.3V_nRF on Top Layer "NONET_L-01_P-001" (solid, pour order 5): 26.551,38.913 26.695,38.913 26.772,38.989 26.772,39.141 26.721,39.192 26.721,40.157 26.848,40.284 27.33,40.284 27.457,40.157 27.457,39.345 27.33,39.218 27.28,39.167 27.28,38.964 27.33,38.913 27.534,38.913 27.584,38.964 27.584,39.04 27.838,39.294 27.838,40.64 28.321,41.123 28.321,41.478 28.169,41.631 27.864,41.631 27.737,41.504 27.737,41.173 27.559,40.996 27.076,40.996 26.492,40.411 26.492,39.192 26.467,39.167 26.467,38.976
3.3V_nRF on Top Layer "NONET_L-01_P-001" (solid, pour order 4): 22.936,38.913 23.089,38.913 23.165,38.989 23.165,39.091 23.139,39.141 23.139,39.268 23.241,39.37 24.409,39.37 24.486,39.294 24.486,39.141 24.435,39.091 24.435,38.964 24.511,38.887 24.689,38.887 24.765,38.964 24.765,39.395 24.13,40.056 24.13,40.411 24.308,40.564 25.476,40.564 25.654,40.411 25.654,38.989 25.73,38.887 25.908,38.887 25.984,38.989 25.984,40.538 25.505,40.996 23.027,40.996 22.911,40.894 22.809,40.792 22.809,40.411 22.911,40.335 22.911,39.141 22.885,39.091 22.885,38.964
3.3V_nRF on Top Layer "NONET_L-01_P-001" (solid, pour order 3): 27.864,38.176 27.864,37.973 27.94,37.897 28.143,37.897 28.169,37.922 28.372,37.922 28.448,37.821 28.448,37.389 28.372,37.338 28.143,37.338 28.092,37.389 27.932,37.389 27.889,37.325 27.889,37.16 27.94,37.109 28.118,37.109 28.143,37.135 28.397,37.135 28.55,36.906 28.55,36.398 28.41,36.119 28.194,36.119 28.118,36.195 27.923,36.195 27.864,36.106 27.864,35.979 27.94,35.865 28.092,35.865 28.143,35.916 29.54,35.916 30.023,36.373 30.023,38.011 30.353,38.259 30.353,38.666 30.15,38.811 29.845,38.811 29.693,38.684 29.693,38.379 29.388,38.202 28.118,38.176 28.042,38.227 27.915,38.227
3.3V_nRF on Top Layer "NONET_L-01_P-001" (solid, pour order 2): 27.864,33.655 27.889,33.63 27.889,33.35 27.864,33.325 27.864,33.172 28.016,33.02 29.261,33.02 29.388,32.893 29.388,32.766 29.54,32.614 30.251,32.614 30.378,32.741 30.378,33.147 30.124,33.401 30.124,34.646 29.794,34.976 28.143,34.976 28.092,35.027 27.94,35.027 27.864,34.95 27.864,34.722 27.94,34.646 29.413,34.646 29.413,33.934 29.286,33.807 28.118,33.807 27.889,33.807 27.864,33.782
3.3V_nRF on Top Layer "NONET_L-01_P-001" (solid, pour order 1): 19.583,36.982 19.761,37.16 20.117,37.16 20.371,36.906 20.371,36.017 21.031,35.357 21.488,35.357 21.514,35.382 21.717,35.382 21.768,35.331 21.768,35.128 21.717,35.077 21.539,35.077 21.514,35.103 20.904,35.103 20.142,35.865 19.583,35.865
3.3V_nRF on Top Layer "NONET_L-01_P-001" (solid, pour order 0): 19.964,39.395 19.964,38.887 20.574,38.887 21.158,38.303 21.692,38.303 21.768,38.379 21.768,38.557 21.692,38.633 21.387,38.633 20.904,39.116 20.904,39.776 20.904,40.081 20.726,40.259 20.295,40.259 20.117,40.081 20.117,39.548
GND on Bottom Layer "GND_L04_P042" (solid, remove dead copper, pour order 42): -0.001,0 -0.001,65 144.999,65 144.999,0
3.3V_nRF on VDD (split plane): 50.45,46.004 45.035,40.589 44.972,40.513 44.926,40.426 44.897,40.332 44.887,40.234 44.887,33.457 34.036,22.606 33.974,22.53 33.927,22.443 33.899,22.348 33.889,22.25 33.889,10.897 33.899,10.799 33.927,10.704 33.974,10.617 34.036,10.541 38.431,6.147 38.507,6.085 38.594,6.038 38.688,6.01 38.786,6 41.814,6 41.814,0.51 0.509,0.51 0.509,64.49 50.45,64.49
3.3V_PCM on VDD (split plane): 144.488,52.115 113.132,52.115 113.034,52.106 112.939,52.077 112.852,52.031 112.776,51.968 111.9,51.091 108.407,54.584 108.331,54.647 108.244,54.693 108.15,54.722 108.052,54.731 82.779,54.731 82.681,54.722 82.586,54.693 82.499,54.647 82.423,54.584 78.74,50.901 78.678,50.825 78.631,50.738 78.603,50.644 78.593,50.546 78.593,41.585 73.864,36.855 73.801,36.779 73.755,36.692 73.726,36.598 73.716,36.5 73.716,31.191 73.716,25.013 69.952,25.013 69.854,25.004 69.759,24.975 69.672,24.929 69.596,24.866 68.199,23.469 68.137,23.393 68.09,23.306 68.062,23.212 68.052,23.114 68.052,18.821 68.062,18.723 68.09,18.629 68.137,18.542 68.199,18.466 70.409,16.256 70.485,16.194 70.572,16.147 70.666,16.119 70.764,16.109 76.663,16.109 76.663,11.018 46.355,11.018 46.257,11.008 46.163,10.98 46.076,10.933 46,10.871 42.134,7.005 38.994,7.005 34.894,11.105 34.894,22.042 45.745,32.893 45.808,32.969 45.854,33.056 45.883,33.151 45.892,33.249 45.892,40.025 51.308,45.441 51.37,45.517 51.417,45.604 51.445,45.698 51.455,45.796 51.455,64.49 144.488,64.49
12V on VDD (split plane): 144.488,0.51 42.819,0.51 42.819,6.269 46.563,10.013 106.959,10.013 107.057,10.023 107.152,10.051 107.239,10.098 107.315,10.16 114.559,17.405 144.488,17.405
PVCC_S on VDD (split plane): 105.492,11.018 77.668,11.018 77.668,18.08 90.779,31.192 90.842,31.268 90.888,31.355 90.917,31.449 90.926,31.547 90.926,34.768 95.611,39.452 105.492,39.452
PVCC_M on VDD (split plane): 144.488,18.409 114.351,18.409 114.253,18.4 114.159,18.371 114.072,18.325 113.996,18.262 106.751,11.018 106.558,11.018 106.497,11.079 106.497,39.503 108.001,39.503 108.099,39.512 108.193,39.541 108.28,39.587 108.356,39.65 111.912,43.206 111.975,43.282 112.021,43.369 112.05,43.463 112.059,43.561 112.059,49.83 113.34,51.11 144.488,51.11
-5V_RC4580 on VDD (split plane): 105.466,46.756 105.466,40.457 95.402,40.457 95.304,40.447 95.21,40.418 95.123,40.372 95.047,40.309 90.069,35.331 90.006,35.255 89.96,35.168 89.931,35.074 89.922,34.976 89.922,31.755 76.81,18.643 76.747,18.567 76.701,18.48 76.672,18.386 76.663,18.288 76.663,17.114 70.973,17.114 69.057,19.03 69.057,22.906 70.16,24.009 78.765,24.009 78.863,24.018 78.958,24.047 79.045,24.093 79.121,24.156 81.051,26.086 81.114,26.162 81.16,26.249 81.189,26.343 81.198,26.441 81.198,30.704 85.674,35.179 85.736,35.255 85.783,35.342 85.811,35.437 85.821,35.535 85.821,44.343 89.362,47.885 104.338,47.885
+5V_RC4580 on VDD (split plane): 111.19,50.38 111.139,50.317 111.093,50.23 111.064,50.136 111.054,50.038 111.054,43.769 107.793,40.507 106.471,40.507 106.471,46.965 106.462,47.063 106.433,47.157 106.387,47.244 106.324,47.32 104.902,48.742 104.826,48.805 104.739,48.851 104.644,48.88 104.546,48.889 89.154,48.889 89.056,48.88 88.962,48.851 88.875,48.805 88.799,48.742 84.963,44.907 84.901,44.831 84.854,44.744 84.826,44.65 84.816,44.552 84.816,35.743 80.341,31.267 80.278,31.191 80.232,31.104 80.203,31.01 80.193,30.912 80.193,26.65 78.557,25.013 74.721,25.013 74.721,31.191 74.721,36.292 79.451,41.021 79.513,41.097 79.56,41.184 79.588,41.279 79.598,41.377 79.598,50.338 82.987,53.727 107.843,53.727
GND on GND (split plane): 144.488,0.51 0.509,0.51 0.509,64.49 144.488,64.49

## Other copper
Top Layer:
  region net RF_A: 7.6,35.9 10,35.9 10,34.1 7.6,34.1
  region net Mech_ANT: 2,35.9 4.9,35.9 4.9,34.1 2,34.1
VDD (plane layer: these items are gaps in the copper):
  lines w1: 42.367,0.102 42.316,0.152 42.316,6.477 46.355,10.516 106.959,10.516 114.351,17.907 144.907,17.907 ; 42.367,6.502 38.786,6.502 34.392,10.897 34.392,22.25 45.39,33.249 45.39,40.234 50.952,45.796 50.952,64.872 ; 74.219,24.587 74.219,31.191 74.219,36.5 79.096,41.377 79.096,50.546 82.779,54.229 108.052,54.229 111.836,50.444 ; 77.038,16.612 70.764,16.612 68.555,18.821 68.555,23.114 69.952,24.511 78.765,24.511 80.696,26.441 80.696,30.912 85.319,35.535 85.319,44.552 89.154,48.387 104.546,48.387 105.969,46.965 105.969,40.107 106.045,40.03 ; 77.165,10.617 77.165,18.288 90.424,31.547 90.424,34.976 95.402,39.954 105.867,39.954 ; 105.994,39.827 105.994,10.871 106.248,10.617 ; 105.994,40.005 108.001,40.005 111.557,43.561 111.557,50.038 113.132,51.613 144.983,51.613
Multi-Layer:
  pour cut-out: 0,34.1 10,34.1 10,26 0,26
  pour cut-out: 0,35.9 0,34.1 2,34.1 2,35.9
  pour cut-out: 0,44 10,44 10,34.1 0,34.1

## Silkscreen, mask and mechanical layers (free items; w line width, h text height)
Top Overlay:
  text "BASS N" at 115.318,60.604 h1
  text "BASS P" at 115.311,58.039 h1
  text "DCX" at 35.255,49.017 h1 r90
  text "CSN" at 36.449,49.017 h1 r90
  text "3v3" at 41.478,49.013 h1 r90
  text "GND" at 42.723,49.017 h1 r90
  text "RESET" at 34.011,49.004 h1 r90
  text "MISO" at 37.744,49 h1 r90
  text "MOSI" at 38.989,48.995 h1 r90
  text "SCK" at 40.259,48.991 h1 r90
  text "SPI M4" at 32.563,48.556 h1 r90
  text "Cortex M Debug (via SWO)" at 7.011,45.235 h1
  text "TWI ( I2C )" at 42.815,39.167 h1
  text "SCL" at 44,37.541 h1
  text "SDA" at 44,36.271 h1
  text "3v3" at 44,35.052 h1
  text "GND" at 44,33.706 h1
  text "USB 2.0" at 17.018,13.224 h1 r90
  text "RIGHT P" at 91.187,8.357 h1
  text "RIGHT N" at 91.161,5.715 h1
  text "12V POS" at 128.108,3.48 h1
  text "12V NEG" at 132.426,3.48 h1
  text "LEFT P" at 114.316,1.727 h1
  text "LEFT N" at 111.497,1.702 h1
Bottom Overlay:
  drawing of 31 lines, arcs and shapes, not listed
  text "Bluetooth Speaker Driver Unit" at 141.772,52.263 h3
  text "For Left and Rght Speakers, support upto 10W / ch with 6-Ω" at 141.681,47.637 h2
  text "For Woofer Speaker, support upto 18W with 4-Ω" at 141.757,45.046 h2
  text "Power supply 12v 5A" at 141.707,43.022 h2
  text "v 1.0.0" at 141.69,39.666 h2.5
  text "2026 SEP" at 141.66,35.043 h2.5
Board Shape:
  the board outline again, w0.05

## Text inside footprints (layer, text, board x,y; h text height)
ANT1: Mechanical 7 "ANT_3.2mm x 1.6mm (1206 imperial)" at 16.7,37.443 h1 r180
C1: Mechanical 7 "1.0 mm x 0.5 mm (0402 imperial)" at 26.939,22.743 h1 r90
C2: Mechanical 7 "0.6 mm X 0.3 mm (0201 imperial)" at 23.541,23.167 h1 r90
C3: Mechanical 7 "0.6 mm X 0.3 mm (0201 imperial)" at 12.7,31.175 h1
C4: Mechanical 7 "0.6 mm X 0.3 mm (0201 imperial)" at 12.607,34.452 h1
C5: Mechanical 7 "0.6 mm X 0.3 mm (0201 imperial)" at 13.039,37.475 h1
C6: Mechanical 7 "0.6 mm X 0.3 mm (0201 imperial)" at 12.708,32.344 h1
C7: Mechanical 7 "1.0 mm x 0.5 mm (0402 imperial)" at 29.427,28.232 h1 r180
C8: Mechanical 7 "0.6 mm X 0.3 mm (0201 imperial)" at 25.689,48.023 h1 r270
C9: Mechanical 7 "0.6 mm X 0.3 mm (0201 imperial)" at 22.311,48.023 h1 r270
C10: Mechanical 7 "0.6 mm X 0.3 mm (0201 imperial)" at 37.045,38.903 h1 r180
C11: Mechanical 7 "0.6 mm X 0.3 mm (0201 imperial)" at 37.172,35.322 h1 r180
C12: Mechanical 7 "1.0 mm x 0.5 mm (0402 imperial)" at 30.213,22.863 h1 r90
C13: Mechanical 7 "1.0 mm x 0.5 mm (0402 imperial)" at 32.627,28.155 h1 r180
C14: Mechanical 7 "0.6 mm X 0.3 mm (0201 imperial)" at 19.65,28.487 h1 r90
C15: Mechanical 7 "0.6 mm X 0.3 mm (0201 imperial)" at 16.704,28.487 h1 r90
C16: Mechanical 7 "2.0 mm X 1.25 mm (0805 imperial)" at 32.95,21.283 h1 r90
C17: Mechanical 7 "2.0 mm X 1.25 mm (0805 imperial)" at 30.689,21.283 h1 r90
C18: Mechanical 7 "0.6 mm X 0.3 mm (0201 imperial)" at 25.111,23.199 h1 r90
C19: Mechanical 7 "1.0 mm x 0.5 mm (0402 imperial)" at 28.562,22.77 h1 r90
C20: Mechanical 7 "1.6 mm x 0.8 mm (0603 imperial)" at 56.851,38.341 h1
C21: Mechanical 7 "2.0 mm X 1.25 mm (0805 imperial)" at 57.458,39.997 h1
C22: Mechanical 7 "1.6 mm x 0.8 mm (0603 imperial)" at 61.025,39.908 h1
C23: Mechanical 7 "2.0 mm X 1.25 mm (0805 imperial)" at 69.393,37.246 h1 r180
C24: Mechanical 7 "2.0 mm X 1.25 mm (0805 imperial)" at 69.393,39.405 h1 r180
C25: Mechanical 7 "2.0 mm X 1.25 mm (0805 imperial)" at 43.689,32.05 h1
C26: Mechanical 7 "1.6 mm x 0.8 mm (0603 imperial)" at 43.995,34.28 h1
C27: Mechanical 7 "1.6 mm x 0.8 mm (0603 imperial)" at 57.858,39.393 h1 r270
C28: Mechanical 7 "2.0 mm X 1.25 mm (0805 imperial)" at 55.628,38.749 h1 r270
C29: Mechanical 7 "1.6 mm x 0.8 mm (0603 imperial)" at 61.025,34.358 h1
C30: Mechanical 7 "2.0 mm X 1.25 mm (0805 imperial)" at 59.533,33.59 h1 r180
C31: Mechanical 7 "1.6 mm x 0.8 mm (0603 imperial)" at 60.177,35.17 h1 r180
C32: Mechanical 7 "1.6 mm x 0.8 mm (0603 imperial)" at 63.094,23.955 h1 r180
C33: Mechanical 7 "3.2 mm x 2.5 mm (1210 imperial)" at 59.288,33.67 h1 r270
C34: Mechanical 7 "2.0 mm X 1.25 mm (0805 imperial)" at 46.634,26.472 h1 r270
C35: Mechanical 7 "1.6 mm x 0.8 mm (0603 imperial)" at 67.285,20.653 h1 r180
C36: Mechanical 7 "1.6 mm x 0.8 mm (0603 imperial)" at 58.489,28.178 h1 r270
C37: Mechanical 7 "3.2 mm x 1.6 mm (1206 imperial)" at 64.541,24.084 h1 r270
C38: Mechanical 7 "2.0 mm X 1.25 mm (0805 imperial)" at 51.367,10.675 h1 r90
C39: Mechanical 7 "1.6 mm x 0.8 mm (0603 imperial)" at 50.996,23.352 h1 r270
C40: Mechanical 7 "1.6 mm x 0.8 mm (0603 imperial)" at 70.015,5.848 h1 r90
C41: Mechanical 7 "3.2 mm x 2.5 mm (1210 imperial)" at 65.517,2.45 h1 r90
C42: Mechanical 7 "1.6 mm x 0.8 mm (0603 imperial)" at 68.39,24.491 h1 r90
C43: Mechanical 7 "1.6 mm x 0.8 mm (0603 imperial)" at 72.047,7.168 h1 r90
C44: Mechanical 7 "1.6 mm x 0.8 mm (0603 imperial)" at 67.265,26.047 h1
C45: Mechanical 7 "2.0 mm X 1.25 mm (0805 imperial)" at 81.658,27.643 h1 r180
C46: Mechanical 7 "1.6 mm x 0.8 mm (0603 imperial)" at 77,24.792 h1 r180
C47: Mechanical 7 "2.0 mm X 1.25 mm (0805 imperial)" at 70.883,26.625 h1 r270
C48: Mechanical 7 "2.0 mm X 1.25 mm (0805 imperial)" at 57.025,28.133 h1
C49: Mechanical 7 "2.0 mm X 1.25 mm (0805 imperial)" at 79.499,16.289 h1 r180
C50: Mechanical 7 "1.6 mm x 0.8 mm (0603 imperial)" at 41.542,-1.188 h1 r90
C51: Mechanical 7 "3.2 mm x 2.5 mm (1210 imperial)" at 19.05,7.783 h1
C52: Mechanical 7 "3.2 mm x 2.5 mm (1210 imperial)" at 19.05,3.533 h1
C53: Mechanical 7 "2.0 mm X 1.25 mm (0805 imperial)" at 55.148,11.508 h1 r180
C54: Mechanical 7 "1.6 mm x 0.8 mm (0603 imperial)" at 42.989,17.089 h1 r270
C55: Mechanical 7 "1.6 mm x 0.8 mm (0603 imperial)" at 41.542,1.733 h1 r90
C56: Mechanical 7 "2.0 mm X 1.25 mm (0805 imperial)" at 20.775,12.283 h1
C57: Mechanical 7 "1.6 mm x 0.8 mm (0603 imperial)" at 21.062,14.643 h1
C58: Mechanical 7 "2.0 mm X 1.25 mm (0805 imperial)" at 21.457,25.009 h1 r270
C59: Mechanical 7 "CAP D10 mm x L11.1 mm" at 138.966,9.992 h1 r90; Top Overlay "+" at 129.657,13.267 h1 r90
C60: Mechanical 7 "2.0 mm X 1.25 mm (0805 imperial)" at 117.726,11.627 h1
C61: Mechanical 7 "1.6 mm x 0.8 mm (0603 imperial)" at 116.376,9.645 h1
C62: Mechanical 7 "2.0 mm X 1.25 mm (0805 imperial)" at 43.507,17.204 h1 r180
C63: Mechanical 7 "1.6 mm x 0.8 mm (0603 imperial)" at 43.581,18.987 h1 r180
C64: Mechanical 7 "2.0 mm X 1.25 mm (0805 imperial)" at 35.478,29.962 h1 r270
C65: Mechanical 7 "3.2 mm x 1.6 mm (1206 imperial)" at 100.467,41.85 h1 r90
C66: Mechanical 7 "3.2 mm x 1.6 mm (1206 imperial)" at 107.058,56.325 h1 r270
C67: Mechanical 7 "CAP D6.3 mm x L5.8 mm" at 115.55,45.225 h1 r180; Mechanical 7 "+" at 110.55,38.892 h1 r180; Top Overlay "+" at 110.55,38.867 h1 r180
C68: Mechanical 7 "2.0 mm X 1.25 mm (0805 imperial)" at 79.375,50.433 h1
C69: Mechanical 7 "2.0 mm X 1.25 mm (0805 imperial)" at 105.867,49.375 h1 r90
C70: Mechanical 7 "+" at 73.267,33.2 h1 r90; Mechanical 7 "CAP D6.3 mm x L5.8 mm" at 79.6,28.2 h1 r90; Top Overlay "+" at 73.242,33.2 h1 r90
C71: Mechanical 7 "+" at 82.167,33.2 h1 r90; Mechanical 7 "CAP D6.3 mm x L5.8 mm" at 88.5,28.2 h1 r90; Top Overlay "+" at 82.142,33.2 h1 r90
C72: Mechanical 7 "+" at 81.033,53.45 h1 r270; Mechanical 7 "CAP D6.3 mm x L5.8 mm" at 74.7,58.45 h1 r270; Top Overlay "+" at 81.058,53.45 h1 r270
C73: Mechanical 7 "+" at 72.133,53.45 h1 r270; Mechanical 7 "CAP D6.3 mm x L5.8 mm" at 65.8,58.45 h1 r270; Top Overlay "+" at 72.158,53.45 h1 r270
C74: Mechanical 7 "CAP D6.3 mm x L6.3 mm" at 104.225,22.575 h1 r180; Top Overlay "+" at 99.297,14.936 h1 r180
C75: Mechanical 7 "1.6 mm x 0.8 mm (0603 imperial)" at 98.387,28.595 h1 r270
C76: Mechanical 7 "1.6 mm x 0.8 mm (0603 imperial)" at 96.761,28.595 h1 r270
C77: Mechanical 7 "1.6 mm x 0.8 mm (0603 imperial)" at 122.183,14.563 h1 r180
C78: Mechanical 7 "1.6 mm x 0.8 mm (0603 imperial)" at 122.183,12.863 h1 r180
C79: Mechanical 7 "CAP D6.3 mm x L6.3 mm" at 77.536,17.503 h1 r270; Top Overlay "+" at 85.175,12.575 h1 r270
C80: Mechanical 7 "CAP D6.3 mm x L6.3 mm" at 96.375,27.275 h1; Top Overlay "+" at 101.303,34.914 h1
C81: Mechanical 7 "1.6 mm x 0.8 mm (0603 imperial)" at 89.693,32.956 h1
C82: Mechanical 7 "1.6 mm x 0.8 mm (0603 imperial)" at 89.693,31.229 h1
C83: Mechanical 7 "3.2 mm x 1.6 mm (1206 imperial)" at 106.879,34.249 h1 r270
C84: Mechanical 7 "3.2 mm x 1.6 mm (1206 imperial)" at 111.637,14.671 h1 r90
C85: Mechanical 7 "1.6 mm x 0.8 mm (0603 imperial)" at 105.073,10.83 h1
C86: Mechanical 7 "1.6 mm x 0.8 mm (0603 imperial)" at 105.073,9.13 h1
C87: Mechanical 7 "2.0 mm X 1.25 mm (0805 imperial)" at 80.274,23.794 h1
C88: Mechanical 7 "3.2 mm x 1.6 mm (1206 imperial)" at 115.123,19.664 h1 r180
C89: Mechanical 7 "2.0 mm X 1.25 mm (0805 imperial)" at 80.351,28.817 h1
C90: Mechanical 7 "3.2 mm x 1.6 mm (1206 imperial)" at 95.062,14.88 h1
C91: Mechanical 7 "2.0 mm X 1.25 mm (0805 imperial)" at 80.351,26.592 h1
C92: Mechanical 7 "1.6 mm x 0.8 mm (0603 imperial)" at 108.142,-1.55 h1 r90
C93: Mechanical 7 "1.6 mm x 0.8 mm (0603 imperial)" at 106.442,-1.55 h1 r90
C94: Mechanical 7 "2.0 mm X 1.25 mm (0805 imperial)" at 80.15,17.483 h1
C95: Mechanical 7 "2.0 mm X 1.25 mm (0805 imperial)" at 80.15,15.283 h1
C96: Mechanical 7 "1.6 mm x 0.8 mm (0603 imperial)" at 109.175,13.817 h1 r180
C97: Mechanical 7 "1.6 mm x 0.8 mm (0603 imperial)" at 109.164,12.154 h1 r180
C98: Mechanical 7 "2.0 mm X 1.25 mm (0805 imperial)" at 76.4,20.958 h1
C99: Mechanical 7 "CAP D6.3 mm x L6.3 mm" at 122.476,25.161 h1; Top Overlay "+" at 127.404,32.8 h1
C100: Mechanical 7 "1.6 mm x 0.8 mm (0603 imperial)" at 138.55,37.367 h1 r180
C101: Mechanical 7 "1.6 mm x 0.8 mm (0603 imperial)" at 138.525,39.067 h1 r180
C102: Mechanical 7 "CAP D6.3 mm x L6.3 mm" at 127.688,32.7 h1 r180; Top Overlay "+" at 122.761,25.061 h1 r180
C103: Mechanical 7 "3.2 mm x 1.6 mm (1206 imperial)" at 137.775,59.917 h1 r180
C104: Mechanical 7 "CAP D6.3 mm x L6.3 mm" at 120.775,41.225 h1 r90; Top Overlay "+" at 113.136,46.153 h1 r90
C105: Mechanical 7 "1.6 mm x 0.8 mm (0603 imperial)" at 117.716,55.265 h1 r270
C106: Mechanical 7 "1.6 mm x 0.8 mm (0603 imperial)" at 121.145,55.265 h1 r270
C107: Mechanical 7 "3.2 mm x 1.6 mm (1206 imperial)" at 126.075,42.668 h1
C108: Mechanical 7 "2.0 mm X 1.25 mm (0805 imperial)" at 109.763,40.38 h1
C109: Mechanical 7 "3.2 mm x 1.6 mm (1206 imperial)" at 126.101,38.451 h1
C110: Mechanical 7 "3.2 mm x 1.6 mm (1206 imperial)" at 137.7,64.892 h1 r180
C111: Mechanical 7 "2.0 mm X 1.25 mm (0805 imperial)" at 111.6,34.133 h1
C112: Mechanical 7 "2.0 mm X 1.25 mm (0805 imperial)" at 111.592,31.896 h1
C113: Mechanical 7 "2.0 mm X 1.25 mm (0805 imperial)" at 109.763,38.094 h1
FB1: Mechanical 7 "FB 1.6 mm x 0.8 mm (0603 imperial)" at 53.308,9.405 h1 r180
FB2: Mechanical 7 "FB 1.6 mm x 0.8 mm (0603 imperial)" at 120.633,16.563 h1 r180
FB3: Mechanical 7 "FB 2.0 mm x 1.25 mm (0805 imperial)" at 79.513,1.007 h1 r90
FB4: Mechanical 7 "FB 1.6 mm x 0.8 mm (0603 imperial)" at 106.61,12.083 h1
FB5: Mechanical 7 "FB 1.6 mm x 0.8 mm (0603 imperial)" at 104.083,13.15 h1 r270
FB6: Mechanical 7 "FB 1.6 mm x 0.8 mm (0603 imperial)" at 107.639,15.882 h1 r180
FB7: Mechanical 7 "FB 2.0 mm x 1.25 mm (0805 imperial)" at 128.787,24.141 h1 r180
IN1: Mechanical 7 "IN 2.5 mm x 2.0 mm (2520 imperial)" at 43.665,18.199 h1
IN2: Mechanical 7 "IN 2.5 mm x 2.0 mm (2520 imperial)" at 63.1,13.067 h1 r180
IN3: Mechanical 7 "IN 7.2 mm x 6.6 mm" at 40.049,1.261 h1 r90
J1: Mechanical 7 "CONN 2 X 5 P 1.27 MM" at 9.125,43.55 h1 r90
J2: Mechanical 7 "JST GH 4 PIN" at 35.425,41.35 h1 r270
J3: Mechanical 7 "JST GH 8 PIN" at 32.075,40.75 h1
J4: Mechanical 7 "USB TYPE A 14.5 mm x 14.0 mm" at -2.175,27.425 h1 r270
J5: Mechanical 7 "JST S2P VH 2 PIN" at 123.6,3.45 h1
J6: Mechanical 7 "JST B2B XH A GU" at 120.275,11.1 h1 r180
J7: Mechanical 7 "JST B2B XH A GU" at 92.9,14.275 h1 r270
J8: Mechanical 7 "JST B2B XH A GU" at 128.1,53.225 h1 r90
L1: Mechanical 7 "IN 1.6 mm x 0.8 mm (0603 imperial)" at 15.35,26.075 h1
L2: Mechanical 7 "IN 1.6 mm x 0.8 mm (0603 imperial)" at 18.45,25.975 h1
L3: Mechanical 7 "IN 0.6 mm x 0.3 mm (0201 imperial)" at 26.78,36.368 h1 r180
L4: Mechanical 7 "IN 0.6 mm x 0.3 mm (0201 imperial)" at 23.935,36.394 h1 r180
L5: Mechanical 7 "IN 0.6 mm x 0.3 mm (0201 imperial)" at 19.922,36.419 h1 r180
Q1A: Mechanical 7 "SOT 2.4 mm x 1.1 mm" at 12.85,50.25 h1 r90
Q1B: Mechanical 7 "SOT 2.4 mm x 1.1 mm" at 18.85,50.25 h1 r90
Q1C: Mechanical 7 "SOT 2.4 mm x 1.1 mm" at 24.85,50.25 h1 r90
Q1D: Mechanical 7 "SOT 2.4 mm x 1.1 mm" at 30.85,50.25 h1 r90
R1: Mechanical 7 "0.6 mm X 0.3 mm (0201 imperial)" at 23.466,20.971 h1 r180
R2A: Mechanical 7 "REC 1.6 mm x 0.8 mm (0603 imperial)" at 20.175,62.767 h1 r180
R2B: Mechanical 7 "REC 1.6 mm x 0.8 mm (0603 imperial)" at 5.825,59.233 h1
R2C: Mechanical 7 "REC 1.6 mm x 0.8 mm (0603 imperial)" at 32.175,62.767 h1 r180
R2D: Mechanical 7 "REC 1.6 mm x 0.8 mm (0603 imperial)" at 17.825,59.233 h1
R3A: Mechanical 7 "REC 1.6 mm x 0.8 mm (0603 imperial)" at 11.767,40.825 h1 r90
R3B: Mechanical 7 "REC 1.6 mm x 0.8 mm (0603 imperial)" at 17.767,40.825 h1 r90
R3C: Mechanical 7 "REC 1.6 mm x 0.8 mm (0603 imperial)" at 23.767,40.825 h1 r90
R3D: Mechanical 7 "REC 1.6 mm x 0.8 mm (0603 imperial)" at 29.767,40.825 h1 r90
R4A: Mechanical 7 "REC 1.6 mm x 0.8 mm (0603 imperial)" at -0.175,52.233 h1
R4B: Mechanical 7 "REC 1.6 mm x 0.8 mm (0603 imperial)" at 5.825,52.233 h1
R4C: Mechanical 7 "REC 1.6 mm x 0.8 mm (0603 imperial)" at 11.825,52.233 h1
R4D: Mechanical 7 "REC 1.6 mm x 0.8 mm (0603 imperial)" at 17.825,52.233 h1
R5: Mechanical 7 "REC 1.6 mm x 0.8 mm (0603 imperial)" at 57.526,38.292 h1
R6: Mechanical 7 "REC 1.6 mm x 0.8 mm (0603 imperial)" at 57.526,36.133 h1
R7: Mechanical 7 "REC 1.6 mm x 0.8 mm (0603 imperial)" at 46.219,18.695 h1
R8: Mechanical 7 "REC 1.6 mm x 0.8 mm (0603 imperial)" at 60.447,11.303 h1 r90
R9: Mechanical 7 "REC 1.6 mm x 0.8 mm (0603 imperial)" at 66.541,4.462 h1 r90
R10: Mechanical 7 "REC 1.6 mm x 0.8 mm (0603 imperial)" at 49.333,26.725 h1 r270
R11: Mechanical 7 "REC 1.6 mm x 0.8 mm (0603 imperial)" at 68.188,2.373 h1 r90
R12: Mechanical 7 "REC 1.6 mm x 0.8 mm (0603 imperial)" at 77.917,21.2 h1 r90
R13: Mechanical 7 "REC 1.6 mm x 0.8 mm (0603 imperial)" at 65.533,31.625 h1 r270
R14: Mechanical 7 "REC 1.6 mm x 0.8 mm (0603 imperial)" at 77.941,18.298 h1 r90
R15: Mechanical 7 "REC 1.6 mm x 0.8 mm (0603 imperial)" at 80.482,26.557 h1 r180
R16: Mechanical 7 "REC 1.6 mm x 0.8 mm (0603 imperial)" at 41.492,1.179 h1 r90
R17: Mechanical 7 "REC 1.6 mm x 0.8 mm (0603 imperial)" at 43.141,0.233 h1 r90
R18: Mechanical 7 "REC 1.6 mm x 0.8 mm (0603 imperial)" at 41.337,20.589 h1 r270
R19: Mechanical 7 "REC 1.6 mm x 0.8 mm (0603 imperial)" at 90.775,53.033 h1
R20: Mechanical 7 "REC 1.6 mm x 0.8 mm (0603 imperial)" at 99.172,51.065 h1
R21: Mechanical 7 "REC 1.6 mm x 0.8 mm (0603 imperial)" at 80.175,50.933 h1
R22: Mechanical 7 "REC 1.6 mm x 0.8 mm (0603 imperial)" at 86.9,50.958 h1
R23: Mechanical 7 "REC 1.6 mm x 0.8 mm (0603 imperial)" at 94.275,51.083 h1
R24: Mechanical 7 "REC 1.6 mm x 0.8 mm (0603 imperial)" at 91.35,51.083 h1
R25: Mechanical 7 "REC 1.6 mm x 0.8 mm (0603 imperial)" at 91.374,43.217 h1
R26: Mechanical 7 "REC 1.6 mm x 0.8 mm (0603 imperial)" at 100.292,35.05 h1 r90
R27: Mechanical 7 "REC 1.6 mm x 0.8 mm (0603 imperial)" at 116.525,46.75 h1 r180
R28: Mechanical 7 "REC 1.6 mm x 0.8 mm (0603 imperial)" at 80.767,31.2 h1 r90
R29: Mechanical 7 "REC 1.6 mm x 0.8 mm (0603 imperial)" at 77.227,47.691 h1 r270
R30: Mechanical 7 "REC 1.6 mm x 0.8 mm (0603 imperial)" at 77.042,38.975 h1 r90
R31: Mechanical 7 "REC 1.6 mm x 0.8 mm (0603 imperial)" at 73.533,55.45 h1 r270
R32: Mechanical 7 "REC 1.6 mm x 0.8 mm (0603 imperial)" at 96.281,52.287 h1 r180
R33: Mechanical 7 "REC 1.6 mm x 0.8 mm (0603 imperial)" at 75.931,45.35 h1
R34: Mechanical 7 "REC 1.6 mm x 0.8 mm (0603 imperial)" at 75.931,47.052 h1
R35: Mechanical 7 "REC 1.6 mm x 0.8 mm (0603 imperial)" at 75.95,43.633 h1
R36: Mechanical 7 "REC 1.6 mm x 0.8 mm (0603 imperial)" at 116.089,21.732 h1 r270
R37: Mechanical 7 "REC 1.6 mm x 0.8 mm (0603 imperial)" at 107.682,21.707 h1 r270
R38: Mechanical 7 "REC 1.6 mm x 0.8 mm (0603 imperial)" at 92.125,2.783 h1
R39: Mechanical 7 "REC 1.6 mm x 0.8 mm (0603 imperial)" at 99.45,35.267 h1 r180
R40: Mechanical 7 "REC 1.6 mm x 0.8 mm (0603 imperial)" at 86.242,12.1 h1 r90
R41: Mechanical 7 "REC 1.6 mm x 0.8 mm (0603 imperial)" at 81.183,37.45 h1 r270
R42: Mechanical 7 "REC 1.6 mm x 0.8 mm (0603 imperial)" at 72.025,19.508 h1
R43: Mechanical 7 "REC 1.6 mm x 0.8 mm (0603 imperial)" at 92.3,6.858 h1
R44: Mechanical 7 "REC 1.6 mm x 0.8 mm (0603 imperial)" at 119.493,58.765 h1 r270
R45: Mechanical 7 "REC 1.6 mm x 0.8 mm (0603 imperial)" at 119.699,29.246 h1 r90
R46: Mechanical 7 "REC 1.6 mm x 0.8 mm (0603 imperial)" at 117.867,53.838 h1 r270
R47: Mechanical 7 "REC 1.6 mm x 0.8 mm (0603 imperial)" at 105.395,36.613 h1
R48: Mechanical 7 "REC 1.6 mm x 0.8 mm (0603 imperial)" at 116.14,53.838 h1 r270
SD1: Mechanical 7 "SD SMB 1A" at 52.723,21.259 h1
SD2: Mechanical 7 "SD SMB 1A" at 55.075,13.475 h1 r270
SW1: Mechanical 7 "SW PB 8.0 mm x 3.5 mm" at 42.261,49.675 h1 r90
SW2: Mechanical 7 "SW PB 8.0 mm x 3.5 mm" at 50.261,49.675 h1 r90
SW3: Mechanical 7 "SW PB 8.0 mm x 3.5 mm" at 58.261,49.675 h1 r90
SW4: Mechanical 7 "SW PB 8.0 mm x 3.5 mm" at 66.261,49.675 h1 r90
SW5: Mechanical 7 "SW PB 8.0 mm x 3.5 mm" at 74.261,49.675 h1 r90
SW6: Mechanical 7 "SW PB 8.0 mm x 3.5 mm" at 82.261,49.675 h1 r90
SW7: Mechanical 7 "SW PB 8.0 mm x 3.5 mm" at 90.261,49.675 h1 r90
SW8: Mechanical 7 "SW PB 8.0 mm x 3.5 mm" at 98.261,49.675 h1 r90
U2: Mechanical 7 "TSSOP 5.5 mm x 4.4 mm 20 PIN" at 65.787,42.75 h1 r180
U3: Mechanical 7 "VQFN 4 mm x 4 mm 24 pin" at 48.444,12.104 h1
U4: Mechanical 7 "HVSSOP 3 mm x 3 mm 9 pin" at 80.6,33.817 h1 r180
U5: Mechanical 7 "HVSSOP 3 mm x 3 mm 9 pin" at 67.033,28.35 h1 r270
U6: Mechanical 7 "SOT 23 2.9 mm x 2.8 mm" at 50.696,10.533 h1 r180
U7: Mechanical 7 "SOT 23 2.9 mm x 2.8 mm 5 pin" at 35.758,22.785 h1 r180
U8: Mechanical 7 "SOT 23 2.9 mm x 2.8 mm 5 pin" at 40.427,11.72 h1 r90
U9: Mechanical 7 "SOIC  3.9 mm x 4.9 mm 8 pin" at 93.925,44.833 h1
U10: Mechanical 7 "SOIC  3.9 mm x 4.9 mm 8 pin" at 82.337,44.803 h1
U11: Mechanical 7 "HTSSOP 9.7 mm x 4.4 mm 28 PIN" at 85.575,20.225 h1
U12: Mechanical 7 "HTSSOP 9.7 mm x 4.4 mm 28 PIN" at 117.875,34.5 h1
X1: Mechanical 7 "CRY_OSC 3.2 mm X 3.2 mm" at 28.7,33.276 h1 r180